# Altium PCB PCB1.PcbDoc
Units mm, origin at the board's own origin, x right, y up, seen from the top; angles counter-clockwise.
Board outline 152.4 x 101.6 mm, 2 copper layers (Top Layer, Bottom Layer); 28 components, 54 nets, 226 pads, 19 vias.
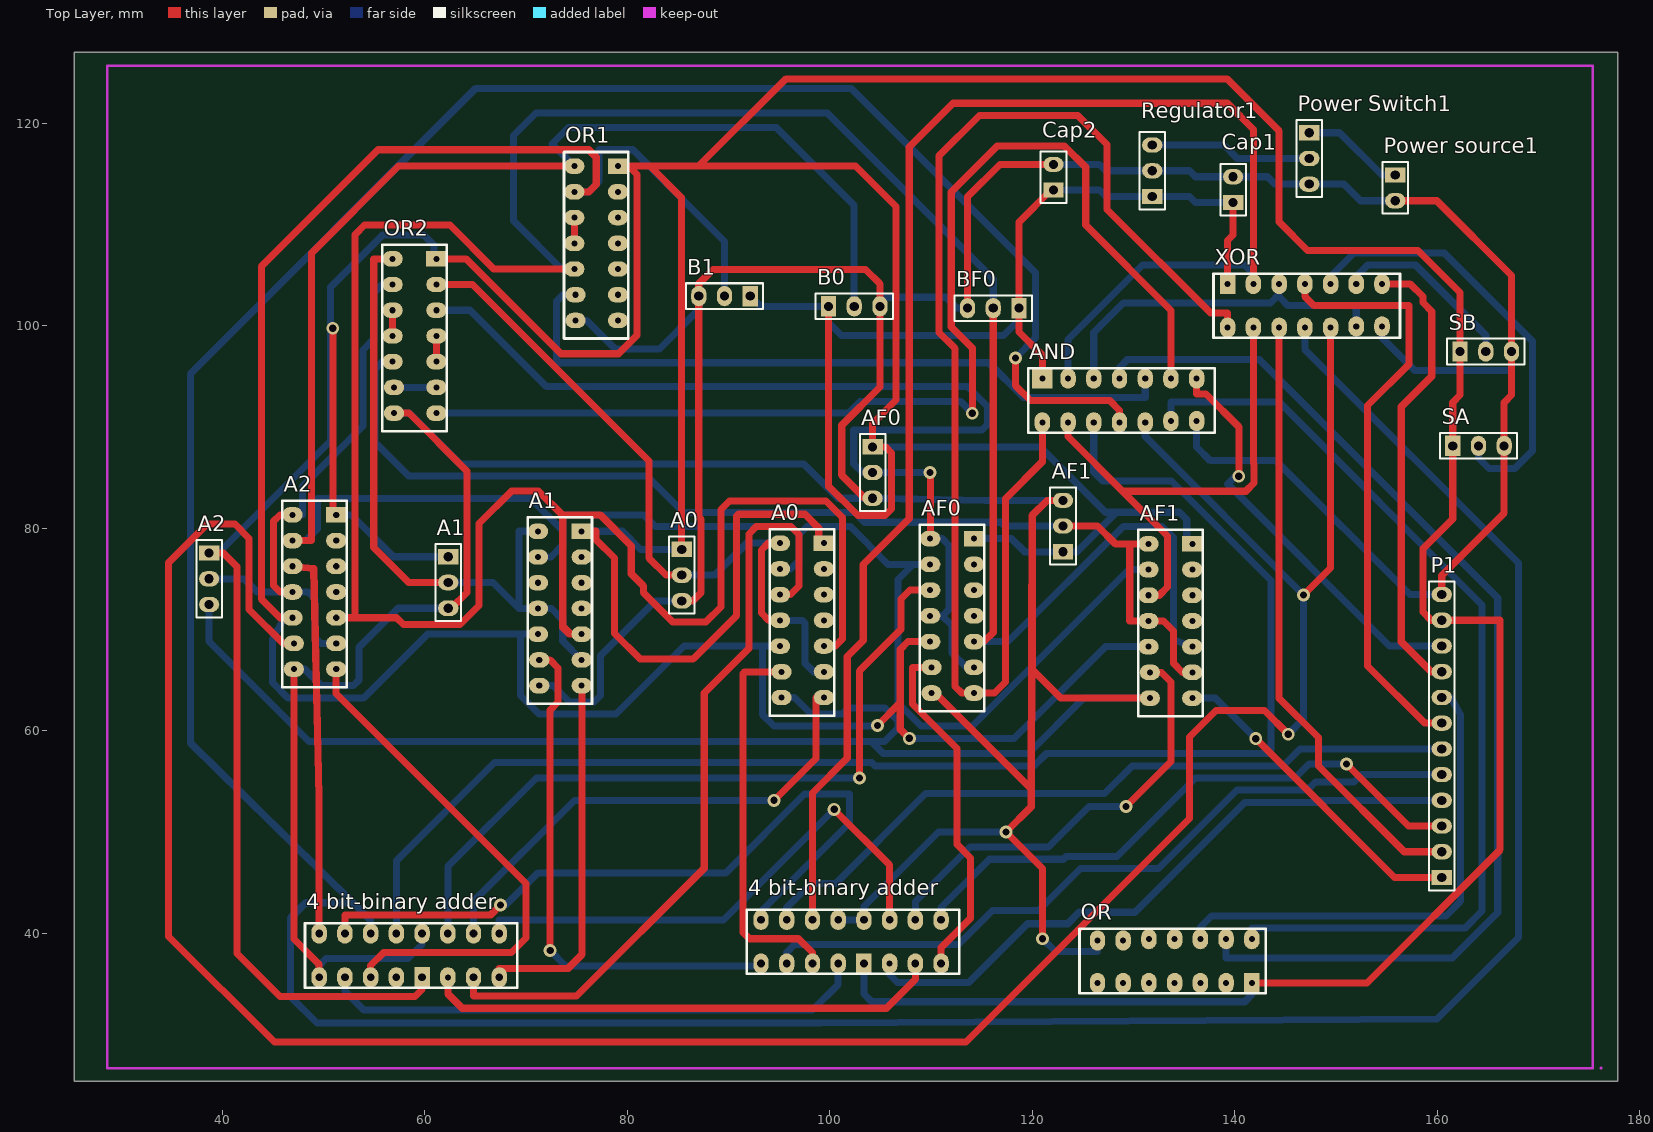
[diagram p0: Top Layer view]
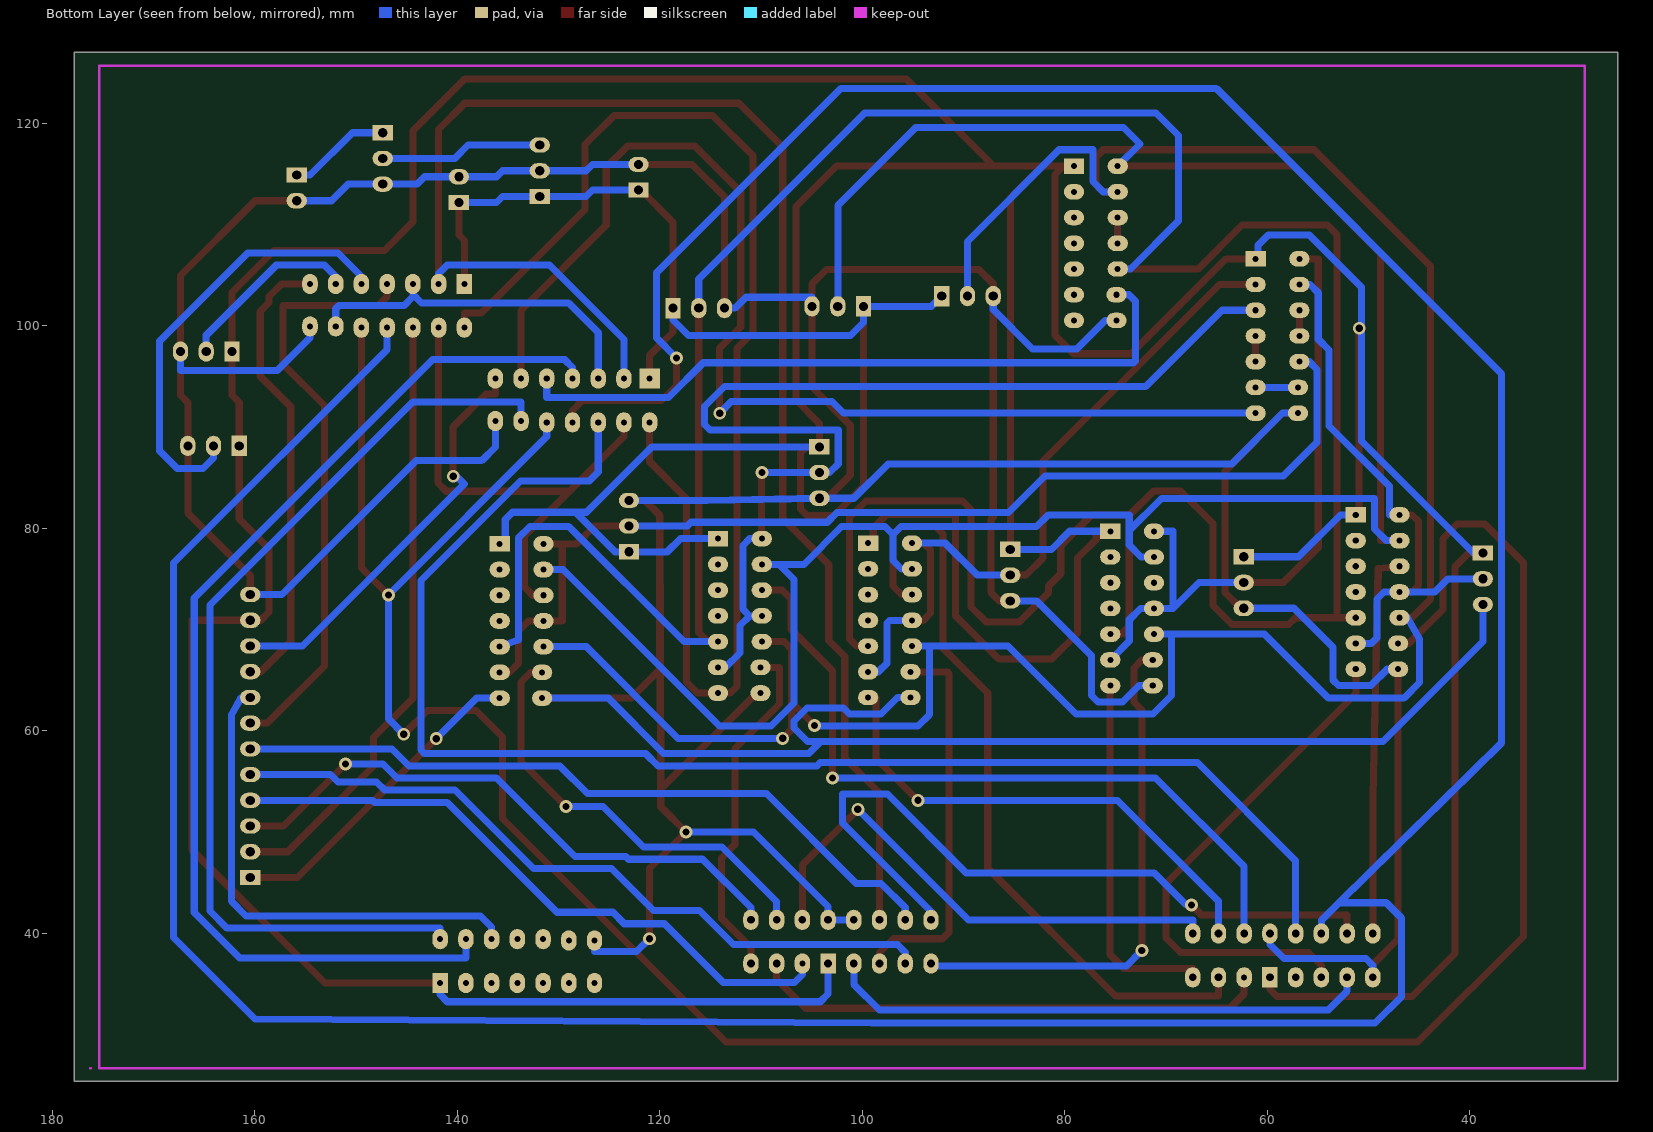
[diagram p1: Bottom Layer view, seen from below]

## Layer stack, top to bottom
Top Solder: solder mask 0.0102, Solder Resist, Dk 3.5
Top Layer: signal copper 0.0356
Dielectric 1: dielectric 0.32, FR-4, Dk 4.8
Bottom Layer: signal copper 0.0356
Bottom Solder: solder mask 0.0102, Solder Resist, Dk 3.5

## Board outline
25.4,25.4 177.8,25.4 177.8,127 25.4,127

## Design rules (kind name [scope] priority, off if disabled: settings)
Clearance [All] p1: gap=0.5 ignorepadtopadclearanceinfootprint=FALSE
PolygonConnect [All] p1: connectstyle=Relief reliefconductorwidth=0.254 reliefentries=4 polygonreliefangle="90 Angle" airgapwidth=0.254
RoutingVias [All] p1: holewidth=0.711 width=1.27 viastyle="Through Hole" minholewidth=0.711 minwidth=1.27 maxholewidth=0.711 maxwidth=1.27
SolderMaskExpansion [All] p1: expansion=0.102
Width [All] p1: maxlimit=1 minlimit=0.5 preferedwidth=0.7 minimp=50.000000 maximp=50.000000 favimp=50.000000
30 further rules are at their usual default settings.

## Classes and differential pairs
component class Sheet1: "4 bit-binary adder" A0 A1 A2 AF0 AF1 AND B0 B1 BF0 Cap1 Cap2 OR OR1 OR2 P1 "Power source1" "Power Switch1" Regulator1 SA SB XOR

## Components (designator, comment, footprint, x,y, rotation, side; value= is the part's Value field where it differs from the comment)
"4 bit-binary adder" "Component_1" 7483 52.628,37.438 r90 top
"4 bit-binary adder" "Component_1" 7483 96.257,38.794 r90 top
A0 "A0" HDR1X3#1 85.387,77.918 r270 top
A0 "A0" Gate?#1 96.872,78.02 r0 top
A1 "A1" HDR1X3#1 62.325,77.185 r270 top
A1 "A1" Gate?#1 72.963,79.195 r0 top
A2 "A2" HDR1X3#2 38.714,77.551 r270 top
A2 "A2" Gate?#2 48.728,80.82 r0 top
AF0 "AF0" HDR1X3#2 104.229,88.044 r270 top
AF0 "AF0" Gate?#2 111.691,78.463 r0 top
AF1 "AF1" HDR1X3#2 123.027,77.677 r90 top
AF1 "AF1" Gate?#3 133.254,77.959 r0 top
AND "A2" Gate?#4 121.493,92.239 r90 top
B0 "B0" HDR1X3#2 99.869,101.917 r0 top
B1 "B1" HDR1X3#2 92.144,102.924 r180 top
BF0 "BF0" HDR1X3#2 118.677,101.734 r180 top
Cap1 "Header 2" HDR1X2 139.827,112.173 r90 top
Cap2 "Header 2" HDR1X2 122.087,113.392 r90 top
OR "A2" Gate?#1 141.163,37.65 r270 top
OR1 "A2" Gate?#1 76.549,115.252 r0 top
OR2 "A2" Gate?#1 58.612,106.101 r0 top
P1 "Header 12" HDR1X12 160.43,45.517 r90 top
"Power source1" "Header 2" HDR1X2 155.839,114.878 r270 top
"Power Switch1" "Header 3" HDR1X3#2 147.346,119.06 r270 top
Regulator1 "Header 3" HDR1X3#3 131.838,117.84 r270 top
SA "Header 3" HDR1X3#2 161.511,88.137 r0 top
SB "Header 3" HDR1X3#2 162.235,97.45 r0 top
XOR "A2" Gate?#2 139.794,101.588 r90 top

## Footprints (in the part's own frame and the unit in brackets; to place one, negate y for a bottom-side part, rotate by r counter-clockwise, add the part's x,y. Pads: shape width x height; smd on the part's side, far side on the other; paste and mask are expansions set on the pad)
7483 [mil]
  oval 78.74x60 hole 30: A1(100,-480) A2(-70,-580) A3(-70,-80) A4(-70,120) B1(100,-380) B2(-70,-480) B3(-70,-180) B4(100,120) C0(100,-180) C1(100,-580) C3(-70,20) C4(100,20) C5(100,-80) GND(100,-280)
  oval 78.74x60 hole 23.62: C2(-70,-380)
  rect 78.74x60 hole 30: Vcc(-70,-280)
  silkscreen extent -110,-650 140,175
Gate?#1 [mil]
  oval 78.74x60 hole 23.62: 1(-70,20) 2(-70,-80) 3(-70,-180) 4(-70,-280) 5(-70,-380) 6(-65,-480) 7(-65,-580) 8(100,-580) 9(100,-480) 10(100,-380) 11(100,-280) 12(100,-180) 13(100,-80)
  rect 78.74x60 hole 23.62: 14(100,20)
  silkscreen extent -110,-650 140,75
Gate?#2 [mil]
  oval 78.74x60.63 hole 23.62: 1(-70,20) 2(-70,-80) 3(-70,-180) 4(-70,-280) 5(-70,-380) 6(-65,-480) 7(-65,-580) 8(100,-580) 9(100,-480) 10(100,-380) 11(100,-280) 12(100,-180) 13(100,-80)
  rect 78.74x60.63 hole 23.62: 14(100,20)
  silkscreen extent -110,-650 140,75
Gate?#3 [mil]
  oval 78.74x60.63 hole 23.62: 1(-70,20) 2(-70,-80) 3(-70,-180) 4(-70,-280) 5(-70,-380) 6(-65,-480) 7(-65,-580) 8(100,-580) 9(100,-480) 10(100,-380) 11(100,-280) 12(100,-180) 13(100,-80)
  rect 78.74x60 hole 23.62: 14(100,20)
  silkscreen extent -110,-650 140,75
Gate?#4 [mil]
  oval 78.74x60 hole 23.62: 1(-70,20) 2(-70,-80) 3(-70,-180) 4(-70,-280) 5(-70,-380) 6(-65,-480) 7(-65,-580) 8(100,-580) 9(100,-480) 10(100,-380) 11(100,-280) 12(100,-180) 13(100,-80)
  rect 78.74x78.74 hole 23.62: 14(100,20)
  silkscreen extent -110,-650 140,75
HDR1X2 [mm] "Connector; Header; 2 Position"
  rect 1.5x2 hole 0.9: 1(0,0)
  oval 1.5x2 hole 0.9: 2(2.54,0)
  silkscreen extent -1.27,-1.27 3.81,1.27
HDR1X3#1 [mm] "Connector; Header; 3 Position"
  rect 1.54x2 hole 0.9: 1(0,0)
  oval 1.54x2 hole 0.9: 2(2.54,0) 3(5.08,0)
  silkscreen extent -1.27,-1.27 6.35,1.27
HDR1X3#2 [mm] "Connector; Header; 3 Position"
  rect 1.5x2 hole 0.9: 1(0,0)
  oval 1.5x2 hole 0.9: 2(2.54,0) 3(5.08,0)
  silkscreen extent -1.27,-1.27 6.35,1.27
HDR1X3#3 [mm] "Connector; Header; 3 Position"
  oval 1.5x2 hole 0.9: 1(0,0) 2(2.54,0)
  rect 1.5x2 hole 0.9: 3(5.08,0)
  silkscreen extent -1.27,-1.27 6.35,1.27
HDR1X12 [mm] "Connector; Header; 12 Position"
  rect 1.5x2 hole 0.9: 1(0,0)
  oval 1.5x2 hole 0.9: 2(2.54,0) 3(5.08,0) 4(7.62,0) 5(10.16,0) 6(12.7,0) 7(15.24,0) 8(17.78,0) 9(20.32,0) 10(22.86,0) 11(25.4,0) 12(27.94,0)
  silkscreen extent -1.27,-1.27 29.21,1.27

## Part data
A0 A1 A2 AF0 AF1 B0 B1 BF0: library part "Header 3", "Header, 3-Pin", LatestRevisionDate=17-Jul-2002, LatestRevisionNote="Re-released for DXP Platform.", Publisher="Altium Limited"
A0 A1 A2 AF0 AF1 AND OR OR1 OR2 XOR: library part Component_1
Cap1 Cap2 "Power source1": "Header, 2-Pin", LatestRevisionDate=17-Jul-2002, LatestRevisionNote="Re-released for DXP Platform.", Publisher="Altium Limited"
P1: "Header, 12-Pin", LatestRevisionDate=17-Jul-2002, LatestRevisionNote="Re-released for DXP Platform.", Publisher="Altium Limited"
"Power Switch1" Regulator1 SA SB: "Header, 3-Pin", LatestRevisionDate=17-Jul-2002, LatestRevisionNote="Re-released for DXP Platform.", Publisher="Altium Limited"

## Via types
v1: diameter 1.27, hole 0.711, Top Layer to Bottom Layer, 19 vias

## Nets (pads, with @x,y where several pads share a name; then routed paths per layer and width w, separated by ;. In a path a pad name is that pad's centre, name@x,y a point inside that pad or via, vN(x,y) a via of type N, cw(c..) or ccw(c..) an arc to the next point about the centre after c; other vN are vias at no path point)
1C1: "4 bit-binary adder.B1"@105.909,41.334 "4 bit-binary adder.C1"@67.36,39.978 | length 52.1
  Top Layer w0.7: v1(100.432,52.248) 105.909,46.77 105.909,41.334
  Bottom Layer w0.7: 67.36,39.978 67.36,41.304 89.488,41.304 v1(100.432,52.248)
1C2: "4 bit-binary adder.B2"@108.449,37.016 "4 bit-binary adder.C2"@62.28,35.66 | length 51.1
  Top Layer w0.7: 62.28,35.66 62.28,34.04 63.711,32.61 105.584,32.61 108.449,35.475 108.449,37.016
1C3: "4 bit-binary adder.B3"@100.829,37.016 "4 bit-binary adder.C3"@52.12,35.66 | length 53.9
  Bottom Layer w0.7: 52.12,35.66 52.12,34.29 53.974,32.436 98.298,32.436 100.829,34.967 100.829,37.016
1C4: "4 bit-binary adder.B4"@93.209,41.334 "4 bit-binary adder.C4"@52.12,39.978 | length 72.6
  Top Layer w0.7: 52.12,39.978 52.12,41.834 66.523,41.834 v1(67.488,42.799)
  Bottom Layer w0.7: v1(67.488,42.799) 67.996,42.799 71.178,45.981 89.745,45.981 97.511,53.746 101.93,53.746 101.93,50.885 93.209,42.164 93.209,41.334
1C5: "4 bit-binary adder.C5"@54.66,39.978 AND.4 XOR.4 | length 399
  Top Layer w0.7: v1(118.339,96.825) 118.339,94.082 119.812,92.608 127.64,92.608 128.605,91.643 AND.4
  Bottom Layer w0.7: 54.66,39.978 54.66,41.301 52.934,43.028 ; v1(118.339,96.825) 120.294,98.781 120.294,105.258 102.11,123.442 65.048,123.442 36.855,95.25 36.855,58.826 52.934,43.028 ; XOR.4 146.906,97.654 168.002,76.558 168.002,39.58 159.969,31.547 99.094,31.14 49.358,31.14 46.768,33.73 46.768,41.536 48.26,43.028 52.934,43.028
2C1: "4 bit-binary adder.C1"@110.989,41.334 P1.3 | length 59.1
  Top Layer w0.7: v1(151.028,56.718) 157.149,50.597 P1.3
  Bottom Layer w0.7: 110.989,41.334 110.989,42.545 115.764,47.32 123.063,47.32 123.342,47.6 128.352,47.6 136.094,55.342 145.947,55.342 147.324,56.718 v1(151.028,56.718)
2C2: "4 bit-binary adder.C2"@105.909,37.016 P1.4 | length 63.4
  Bottom Layer w0.7: 105.909,37.016 105.909,35.924 106.68,35.154 113.724,35.154 119.521,40.95 123.492,40.95 124.623,42.082 130.143,42.082 141.003,52.942 148.151,52.942 148.347,53.137 P1.4
2C3: "4 bit-binary adder.C3"@95.749,37.016 P1.5 | length 73.1
  Bottom Layer w0.7: 95.749,37.016 95.749,38.117 96.52,38.887 112.694,38.887 116.053,42.247 120.606,42.247 124.759,46.4 132.454,46.4 140.196,54.142 147.147,54.142 147.951,54.945 151.772,54.945 152.504,55.677 P1.5
2C4: "4 bit-binary adder.C4"@95.749,41.334 P1.6 | length 72.4
  Bottom Layer w0.7: 95.749,41.334 95.749,42.539 98.134,44.924 100.588,44.924 109.461,53.797 127.124,53.797 129.868,56.542 144.738,56.542 146.414,58.217 P1.6
2C5: "4 bit-binary adder.C5"@98.289,41.334 AND.13 XOR.13 | length 158.9
  Top Layer w0.7: 98.289,41.334 98.289,53.873 101.727,57.311 101.727,67.335 103.302,68.91 103.302,76.429 107.848,80.975 107.848,117.654 112.166,121.972 139.241,121.972 141.826,119.388 XOR.13
  Bottom Layer w0.7: AND.13 123.525,98.633 130.886,105.994 140.97,105.994 141.826,105.138 XOR.13
A0: A0.1@95.094,78.528 A0.2@85.387,75.378 A0.4 A0.9 OR2.13 | length 72
  Top Layer w0.7: OR2.13 64.714,104.069 82.152,86.631 82.152,77.046 83.82,75.378 A0.2@85.387,75.378 ; A0.4 93.98,70.908 93.243,71.644 93.243,77.849 93.922,78.528 A0.1@95.094,78.528
  Bottom Layer w0.7: A0.2@85.387,75.378 88.645,75.378 91.796,78.528 A0.1@95.094,78.528 ; A0.4 97.307,70.908 97.561,70.654 97.561,66.675 98.409,65.828 A0.9
A0+A1+A2+AF0+AF1: AND.9 OR2.8 | length 116.9
  Top Layer w0.7: v1(114.071,91.364) 114.071,97.798 111.997,99.873 111.997,113.216 116.51,117.729 123.19,117.729 125.273,115.646 125.273,109.931 133.685,101.519 AND.9
  Bottom Layer w0.7: OR2.8 101.853,91.369 102.991,92.506 112.929,92.506 v1(114.071,91.364)
A0+AF0: OR2.10 OR2.11 | length 2.5
  Top Layer w0.7: OR2.10 OR2.11
A1: A1.1@71.185,79.703 A1.2@62.325,74.645 A1.4 A1.9 OR2.1 | length 66.2
  Top Layer w0.7: OR2.1 54.966,106.609 54.966,78.1 58.42,74.645 A1.2@62.325,74.645
  Bottom Layer w0.7: A1.2@62.325,74.645 66.754,74.645 69.317,72.083 ; A1.1@71.185,79.703 69.317,79.703 69.317,72.083 ; A1.9 75.491,67.003 73.635,68.859 73.635,70.965 72.517,72.083 A1.4 69.317,72.083
A1+A2: OR2.3 OR2.4 | length 2.5
  Top Layer w0.7: OR2.4 OR2.3
A1+A2+AF1: OR2.6 OR2.9 | length 4.2
  Bottom Layer w0.7: OR2.6 OR2.9
A2: A2.1@46.95,81.328 A2.2@38.714,75.011 A2.4 A2.9 OR2.2 | length 56.1
  Top Layer w0.7: A2.4 45.72,73.708 45.085,74.343 45.085,80.693 45.72,81.328 A2.1@46.95,81.328
  Bottom Layer w0.7: A2.2@38.714,75.011 42.164,75.011 43.468,73.708 A2.4 48.492,73.708 49.174,73.025 49.174,69.187 49.733,68.628 A2.9 ; A2.1@46.95,81.328 47.93,81.328 47.93,84.15 53.893,90.113 53.893,97.59 54.966,98.663 54.966,103.251 55.783,104.069 OR2.2
AF0: AF0.1@109.913,78.971 AF0.2@104.229,85.504 AF0.4 AF0.9 OR2.12 | length 108.8
  Top Layer w0.7: v1(109.906,85.504) 109.931,85.479 109.931,78.971 AF0.1@109.913,78.971
  Bottom Layer w0.7: OR2.12 64.47,101.529 72.008,93.991 113.603,93.991 115.57,92.024 115.57,90.246 115.037,89.713 102.362,89.713 102.362,86.36 103.218,85.504 104.229,85.504 v1(109.906,85.504) ; AF0.4 111.1,71.351 ; AF0.1@109.913,78.971 111.125,78.971 111.785,78.31 111.785,72.011 111.125,71.351 111.1,71.351 ; AF0.9 113.485,66.271 112.065,67.691 112.065,70.386 111.1,71.351
AF1: AF1.1@131.476,78.467 AF1.2@123.027,80.217 AF1.4 AF1.9 OR2.5 | length 107.5
  Top Layer w0.7: AF1.2@123.027,80.217 126.441,80.217 128.192,78.467 129.616,78.467 ; AF1.1@131.476,78.467 129.616,78.467 ; AF1.9 134.843,65.767 133.934,66.675 133.934,69.85 132.938,70.847 AF1.4 129.616,70.847 129.616,78.467
  Bottom Layer w0.7: OR2.5 55.855,96.449 55.093,95.687 55.093,88.494 58.426,85.161 81.966,85.161 85.567,81.559 102.489,81.559 103.454,80.594 116.891,80.594 117.268,80.217 AF1.2@123.027,80.217
B0: A0.2@95.094,75.988 A1.2@71.185,77.163 A2.2@46.95,78.788 AF0.2@109.913,76.431 AF1.2@131.476,75.927 B0.2 OR1.1 | length 234
  Top Layer w0.7: A2.2@46.95,78.788 48.819,78.788 48.819,107.163 57.416,115.76 OR1.1
  Bottom Layer w0.7: A2.2@46.95,78.788 48.26,78.788 49.403,79.931 49.403,82.956 70.46,82.956 73.635,79.781 ; A1.2@71.185,77.163 72.464,77.163 73.635,78.334 73.635,79.781 ; OR1.1 72.584,117.948 74.206,119.57 94.718,119.57 102.409,111.878 B0.2 ; A0.2@95.094,75.988 96.105,75.988 96.952,76.835 96.952,79.375 ; AF0.2@109.913,76.431 108.232,76.431 ; AF1.2@131.476,75.927 129.54,75.927 114.091,60.477 108.991,60.477 106.731,62.738 106.731,74.93 108.232,76.431 ; 73.635,79.781 73.635,81.331 81.61,81.331 82.779,80.162 96.164,80.162 96.952,79.375 ; 96.952,79.375 97.739,80.162 102.032,80.162 105.763,76.431 108.232,76.431
B0*A0: "4 bit-binary adder.B2"@64.82,35.66 A0.3@95.094,73.448 | length 77.5
  Top Layer w0.7: 64.82,35.66 64.82,33.81 74.981,33.81 87.605,46.433 87.605,63.729 92.024,68.148 92.024,79.451 92.735,80.162 96.164,80.162 96.952,79.375 96.952,74.295 96.105,73.448 A0.3@95.094,73.448
B0*A1: "4 bit-binary adder.B3"@57.2,35.66
B0*A2: "4 bit-binary adder.B4"@49.58,39.978 A2.3@46.95,76.248 | length 38.2
  Top Layer w0.7: A2.3@46.95,76.248 49.047,76.019 49.58,53.468 49.58,39.978
B0*AF0: "4 bit-binary adder.B1"@62.28,39.978 AF0.3@109.913,73.891 | length 73.5
  Top Layer w0.7: v1(102.934,55.354) 102.934,65.927 107.038,70.03 107.038,73.025 107.904,73.891 AF0.3@109.913,73.891
  Bottom Layer w0.7: 62.28,39.978 62.28,46.608 71.026,55.354 v1(102.934,55.354)
B0*AF1: AF1.3@131.476,73.387 AND.2 XOR.2 | length 51.2
  Top Layer w0.7: AND.2 123.525,89.047 128.917,83.656 ; AF1.3@131.476,73.387 132.537,73.387 133.35,74.199 133.35,79.223 128.917,83.656 ; XOR.2 141.826,86.405 141.871,86.36 141.871,84.455 141.072,83.656 128.917,83.656
B0+B1: OR1.3 OR1.4 | length 2.5
  Top Layer w0.7: OR1.4 OR1.3
B0+B1+BF1: AND.10 OR1.6 | length 69.5
  Bottom Layer w0.7: OR1.6 73.66,103.06 73.025,102.425 73.025,96.52 73.197,96.348 115.691,96.348 119.126,92.913 131.145,92.913 AND.10
B1: A0.5 A1.5 A2.5 AF0.5 AF1.5 B1.2 OR1.2 | length 241.3
  Top Layer w0.7: A2.5 45.72,71.168 43.866,73.022 43.866,105.842 55.397,117.373 76.2,117.373 76.937,116.637 76.937,113.957 76.2,113.22 OR1.2 ; v1(104.7,60.528) 106.959,62.788 ; v1(107.853,59.259) 106.959,60.152 106.959,62.788 ; AF0.5 107.724,68.811 106.959,68.047 106.959,62.788
  Bottom Layer w0.7: A2.5 46.152,71.168 44.958,69.063 44.958,64.77 46.482,63.246 53.975,63.246 60.272,69.543 69.444,69.543 ; A1.5 69.444,69.543 ; OR1.2 76.2,113.22 77.216,114.236 77.216,117.373 80.56,117.373 89.604,108.33 B1.2 ; A0.5 93.37,68.368 ; v1(104.7,60.528) 104.647,60.476 94.49,60.476 93.37,61.595 93.37,68.368 ; v1(107.853,59.259) 118.19,59.259 127.238,68.307 AF1.5 ; 69.444,69.543 69.444,63.5 71.293,61.651 78.898,61.651 85.614,68.368 93.37,68.368
B1*A0: "4 bit-binary adder.A3"@98.289,37.016 A0.6 | length 38.2
  Top Layer w0.7: A0.6 91.592,65.828 91.44,65.675 91.44,40.107 92.075,39.472 96.918,39.472 98.289,38.1 98.289,37.016
B1*A1: "4 bit-binary adder.A4"@93.209,37.016 A1.6 | length 52.1
  Top Layer w0.7: A1.6 72.39,67.003 73.177,66.216 73.177,62.84 72.39,62.052 v1(72.39,38.303)
  Bottom Layer w0.7: v1(72.39,38.303) 73.914,36.779 93.209,36.779 93.209,37.016
B1*A2: A2.6 AND.5 XOR.5 | length 259.3
  Top Layer w0.7: A2.6 46.025,68.628 42.666,71.987 42.666,78.994 41.252,80.408 38.523,80.408 34.714,76.599 34.714,39.708 45.154,29.268 113.443,29.268 135.509,51.333 135.509,59.385 138.125,62.001 142.926,62.001 v1(145.263,59.665) ; v1(146.787,73.406) 149.446,76.065 XOR.5
  Bottom Layer w0.7: AND.5 131.145,89.047 v1(146.787,73.406) 146.787,61.189 v1(145.263,59.665)
B1*AF0: "4 bit-binary adder.A2"@110.989,37.016 AF0.6 | length 34.7
  Top Layer w0.7: AF0.6 108.179,66.271 108.179,62.636 112.547,58.268 112.547,48.793 113.894,47.447 113.894,41.487 110.989,38.583 110.989,37.016
B1*AF1: "4 bit-binary adder.A1"@108.449,41.334 AF1.6 | length 43.1
  Top Layer w0.7: v1(129.256,52.533) 133.68,56.958 133.68,64.827 132.74,65.767 AF1.6
  Bottom Layer w0.7: 108.449,41.334 108.449,43.142 113.829,48.522 121.596,48.522 125.607,52.533 v1(129.256,52.533)
BF0: A0.10 A1.10 A2.10 AF0.10 AF1.10 BF0.2 OR1.5 | length 314.9
  Top Layer w0.7: A2.10 53.137,71.168 ; OR1.5 66.815,105.6 62.484,109.931 54.051,109.931 53.137,109.017 53.137,71.168 ; A1.10 74.447,69.543 ; A0.10 100.55,68.368 101.27,69.088 101.27,81.056 99.624,82.702 90.094,82.702 89.256,81.864 89.256,72.238 87.782,70.764 84.48,70.764 81.585,73.66 81.585,74.32 80.391,75.514 80.391,78.267 77.327,81.331 73.635,81.331 73.635,81.28 ; AF0.10 115.238,68.811 116.137,69.71 BF0.2 ; 53.137,71.168 57.229,71.168 57.912,70.485 63.5,70.485 65.375,72.36 65.375,80.458 68.58,83.663 71.251,83.663 73.635,81.28 ; 73.635,70.356 73.635,70.203 74.295,69.543 74.447,69.543 ; 73.635,70.356 73.635,81.28 ; 73.635,70.356 74.447,69.543
  Bottom Layer w0.7: OR1.5 73.521,105.6 68.756,110.365 68.756,118.781 70.979,121.004 99.754,121.004 116.137,104.621 BF0.2 ; AF0.10 117.604,68.811 128.981,80.188 132.817,80.188 133.934,79.07 133.934,68.992 AF1.10
BF0*A0: "4 bit-binary adder.A1"@64.82,39.978 A0.8 | length 49.6
  Top Layer w0.7: v1(94.488,53.137) 98.628,57.277 98.628,63.288 A0.8
  Bottom Layer w0.7: 64.82,39.978 64.82,43.18 74.777,53.137 v1(94.488,53.137)
BF0*A1: "4 bit-binary adder.A2"@67.36,35.66 A1.8 | length 36.2
  Top Layer w0.7: 67.36,35.66 67.36,36.551 74.171,36.551 75.514,37.894 75.514,64.463 A1.8
BF0*A2: "4 bit-binary adder.A3"@54.66,35.66 A2.8 | length 52
  Top Layer w0.7: A2.8 51.257,66.088 51.257,63.697 70.013,44.941 70.013,39.559 68.58,38.125 55.956,38.125 54.66,36.83 54.66,35.66
BF0*AF0: AF0.8 AND.1 XOR.1 | length 129.3
  Top Layer w0.7: AND.1 120.985,86.566 117.337,82.917 117.337,64.814 116.253,63.731 AF0.8 113.03,63.731 112.37,64.391 112.37,97.772 110.797,99.345 110.797,116.79 114.779,120.772 124.49,120.772 127.381,117.881 127.381,111.481 137.617,101.244 139.286,101.244 XOR.1
BF0*AF1: AF1.8 P1.1 | length 32
  Top Layer w0.7: v1(142.062,59.227) 155.771,45.517 P1.1
  Bottom Layer w0.7: AF1.8 138.062,63.227 v1(142.062,59.227)
"Full adder carry": OR.3 P1.8 | length 49.2
  Bottom Layer w0.7: OR.3 136.591,40.64 137.683,41.732 160.833,41.732 162.281,43.18 162.281,61.595 161.304,63.297 P1.8
"Full adder sum": P1.7 XOR.11 | length 58.8
  Top Layer w0.7: XOR.11 146.906,102.87 147.795,101.981 157.175,101.981 157.175,96.18 153.104,92.109 153.104,66.403 158.75,60.757 P1.7
GND: "4 bit-binary adder.A4"@49.58,35.66 "4 bit-binary adder.C0"@100.829,41.334 "4 bit-binary adder.GND" "Power source1.2" "Power Switch1.3" A0.3@85.387,72.838 A0.7 A1.3@62.325,72.105 A1.7 A2.3@38.714,72.471 A2.7 AF0.3@104.229,82.964 AF0.7 AF1.3@123.027,82.757 AF1.7 AND.7 B0.3 B1.3 BF0.3 Cap1.2 Cap2.2 OR1.7 OR2.7 OR.7 P1.12 Regulator1.2 SA.3 SB.3 XOR.7 | length 675.9
  Top Layer w0.7: A2.7 47.077,39.435 49.58,36.932 49.58,35.66 ; OR2.7 58.445,91.369 64.175,85.639 64.175,73.66 62.621,72.105 A1.3@62.325,72.105 ; A0.3@85.387,72.838 86.477,72.838 87.3,73.66 87.3,80.881 87.064,81.117 B1.3 87.064,104.14 88.486,105.562 103.527,105.562 104.949,104.14 B0.3 104.949,93.94 101.179,90.17 101.179,85.244 103.459,82.964 AF0.3@104.229,82.964 ; AF0.7 110.414,63.731 119.894,54.25 ; BF0.3 113.597,112.738 116.791,115.932 Cap2.2 ; v1(121.006,39.465) 121.006,46.406 v1(117.399,50.013) 119.888,52.502 119.894,54.25 ; AF1.3@123.027,82.757 121.467,82.757 119.99,81.28 ; AF1.7 122.803,63.227 119.99,66.04 119.99,81.28 ; 155.839,112.338 159.937,112.338 167.315,104.961 SB.3 167.315,93.154 166.591,92.431 SA.3 166.591,81.501 160.426,75.336 160.426,73.457 P1.12 ; 119.894,54.25 119.99,81.28
  Bottom Layer w0.7: A2.3@38.714,72.471 38.71,72.471 38.71,68.834 48.59,58.953 104.089,58.953 ; A2.7 48.161,66.088 49.781,64.468 52.962,64.468 53.492,64.999 53.492,68.224 57.373,72.105 A1.3@62.325,72.105 ; 49.58,35.66 49.58,36.83 50.266,37.516 58.343,37.516 59.74,38.913 59.74,39.978 ; OR2.7 58.496,91.369 63.504,86.361 97.435,86.361 100.832,82.964 104.229,82.964 115.337,82.757 AF1.3@123.027,82.757 ; A1.7 72.683,64.463 74.295,62.851 76.704,62.851 77.354,63.5 77.354,67.412 82.779,72.838 A0.3@85.387,72.838 ; OR1.7 75.997,100.52 78.809,97.708 83.172,97.708 87.064,101.6 B1.3 ; A0.7 96.52,63.288 98.132,61.676 101.27,61.676 101.843,62.249 105.442,62.249 106.731,60.96 106.731,60.274 105.41,58.953 104.089,58.953 ; 100.829,41.334 103.369,41.334 103.369,42.663 110.719,50.013 v1(117.399,50.013) ; B0.3 104.949,102.809 111.47,102.809 112.545,101.734 BF0.3 ; v1(121.006,39.465) 122.276,38.195 126.431,38.195 OR.7 ; Cap2.2 126.644,115.932 127.276,115.3 Regulator1.2 135.534,115.3 136.122,114.713 Cap1.2 143.205,114.713 143.938,113.98 147.346,113.98 150.749,113.98 152.39,112.338 155.839,112.338 ; AF1.7 125.076,63.227 119.612,57.763 105.279,57.763 104.089,58.953 ; AND.7 136.225,88.021 137.572,86.674 144.065,86.674 157.282,73.457 P1.12 ; XOR.7 154.526,98.814 157.759,95.58 167.315,95.58 SB.3
"Half adder Carry": "4 bit-binary adder.C0"@57.2,39.978 AND.3 | length 141.9
  Bottom Layer w0.7: 57.2,39.978 57.2,47.167 66.904,56.871 104.14,56.871 104.47,56.54 120.167,56.54 121.369,57.742 143.205,57.742 143.561,58.097 143.561,74.828 133.731,84.658 126.949,84.658 126.065,85.542 AND.3
"Half adder Sum": P1.2 XOR.3 | length 60.6
  Top Layer w0.7: XOR.3 144.366,63.21 148.248,59.328 148.248,56.528 156.719,48.057 P1.2
NetAND_6: AND.6 OR.1 | length 95.6
  Bottom Layer w0.7: AND.6 133.685,92.456 144.374,92.456 164.4,72.429 164.4,42.201 162.712,40.513 141.671,40.513 OR.1
NetAND_11: AND.11 OR.2 | length 110.1
  Bottom Layer w0.7: AND.11 128.605,95.885 129.367,96.647 142.418,96.647 165.951,73.114 165.951,42.05 161.467,37.567 139.131,37.567 OR.2
NetAND_12: AND.12 XOR.6 XOR.12 | length 35.5
  Bottom Layer w0.7: AND.12 126.065,99.344 128.981,102.26 143.51,102.26 144.366,103.116 ; XOR.12 144.366,103.116 ; XOR.6 151.986,101.676 151.681,101.981 145.255,101.981 144.366,102.87 144.366,103.116
"NetPower source1_1": "Power source1.1" "Power Switch1.1" | length 10.2
  Bottom Layer w0.7: 147.346,119.06 150.343,119.06 154.524,114.878 155.839,114.878
"NetPower Switch1_2": "Power Switch1.2" Regulator1.1 | length 16.1
  Bottom Layer w0.7: Regulator1.1 138.913,117.84 140.233,116.52 147.346,116.52
SA: SA.2 XOR.10 | length 43.7
  Bottom Layer w0.7: XOR.10 149.446,104.877 151.757,107.188 160.68,107.188 169.367,98.501 169.367,87.63 167.64,85.903 165.1,85.903 164.051,86.952 SA.2
SB: SB.2 XOR.9 | length 18.5
  Bottom Layer w0.7: XOR.9 151.986,104.877 153.088,105.978 157.857,105.978 164.775,99.06 SB.2
SC: P1.9 XOR.8 | length 45.5
  Top Layer w0.7: XOR.8 154.526,104.14 157.302,104.14 158.572,102.87 158.572,102.281 159.438,101.415 159.438,95.006 156.428,91.996 156.428,68.794 159.385,65.837 P1.9
Vcc: "4 bit-binary adder.Vcc" A0.1@85.387,77.918 A0.14 A1.1@62.325,77.185 A1.14 A2.1@38.714,77.551 A2.14 AF0.1@104.229,88.044 AF0.14 AF1.1@123.027,77.677 AF1.14 AND.14 B0.1 B1.1 BF0.1 Cap1.1 Cap2.1 OR1.14 OR2.14 OR.14 P1.11 Regulator1.3 SA.1 SB.1 XOR.14 | length 727.9
  Top Layer w0.7: A2.1@38.714,77.551 40.114,77.551 41.466,76.2 41.466,38.011 45.72,33.757 59.055,33.757 59.74,34.442 59.74,35.66 ; v1(50.927,99.746) 50.927,81.328 A2.14 ; OR2.14 64.079,106.609 73.457,97.231 79.121,97.231 80.95,99.06 80.95,114.935 80.125,115.76 ; A1.14 76.893,79.703 76.893,78.907 78.74,77.06 78.74,69.621 81.28,67.081 86.512,67.081 90.805,71.374 90.805,81.204 90.983,81.382 97.536,81.382 98.908,80.01 98.908,78.528 A0.14 ; OR1.14 80.125,115.76 ; A0.1@85.387,77.918 85.369,77.918 85.369,112.636 82.245,115.76 ; B0.1 99.869,84.154 102.768,81.255 105.435,81.255 106.096,81.915 106.096,87.427 105.479,88.044 104.229,88.044 104.216,88.044 104.216,90.322 106.553,92.659 106.553,111.76 102.553,115.76 87.046,115.76 ; AND.14 120.985,97.079 118.677,99.387 BF0.1 118.677,110.225 121.844,113.392 Cap2.1 ; XOR.14 139.286,108.415 139.827,108.956 Cap1.1 ; OR.14 141.671,35.103 153.035,35.103 166.196,48.264 166.196,70.917 P1.11 159.385,70.917 158.572,71.73 158.572,77.978 161.511,80.917 SA.1 161.511,92.431 162.235,93.154 SB.1 162.235,103.271 158.064,107.442 147.168,107.442 144.374,110.236 144.374,119.228 139.221,124.38 95.666,124.38 87.046,115.76 ; 80.125,115.76 82.245,115.76 ; 82.245,115.76 87.046,115.76
  Bottom Layer w0.7: A2.1@38.714,77.551 39.624,77.551 50.689,88.616 v1@50.689,99.746 ; v1(50.927,99.746) v1@50.689,99.746 ; A2.14 52.779,81.328 56.921,77.185 A1.1@62.325,77.185 ; OR2.14 60.909,106.609 60.909,107.95 59.919,108.941 55.829,108.941 50.689,103.8 v1@50.689,99.746 ; A1.14 79.527,79.703 81.313,77.918 A0.1@85.387,77.918 ; B1.1 93.15,101.917 B0.1 99.869,100.33 101.165,99.035 117.139,99.035 118.677,100.573 BF0.1 ; 103.369,37.016 103.369,34.019 104.14,33.249 140.97,33.249 141.671,33.95 OR.14 ; AF0.1@104.229,88.044 120.752,88.044 127.217,81.579 128.315,81.579 ; AF0.14 117.958,78.971 119.251,77.677 123.027,77.677 124.413,77.677 128.315,81.579 ; Cap2.1 126.644,113.392 127.276,112.76 Regulator1.3 135.534,112.76 136.122,112.173 Cap1.1 ; AF1.14 135.249,78.467 135.249,80.867 134.538,81.579 128.315,81.579
"~zero flag": AND.8 P1.10 | length 41.1
  Top Layer w0.7: AND.8 136.225,93.243 137.16,93.243 140.386,90.018 v1(140.386,85.141)
  Bottom Layer w0.7: v1(140.386,85.141) 140.076,85.141 139.292,84.356 155.27,68.377 P1.10
pads on no net: A0.11 A0.12 A0.13 A1.3@71.185,74.623 A1.11 A1.12 A1.13 A2.11 A2.12 A2.13 AF0.11 AF0.12 AF0.13 AF1.11 AF1.12 AF1.13 OR1.8 OR1.9 OR1.10 OR1.11 OR1.12 OR1.13 OR.4 OR.5 OR.6 OR.8 OR.9 OR.10 OR.11 OR.12 OR.13

## Keep-outs
Top Layer:
  lines w0.254: 176.152,26.689 176.195,26.733
Bottom Layer:
  lines w0.254: 176.199,26.679 176.206,26.686
Keep-Out Layer:
  lines w0.254: 28.645,26.663 175.346,26.663 175.346,125.666 28.645,125.666 28.645,26.663